# Altium PCB Photoelectric tube to Ammeter 02.PcbDoc
Units mm, origin at the board's own origin, x right, y up, seen from the top; angles counter-clockwise.
Board outline 43 x 34.5 mm, 2 copper layers (Top Layer, Bottom Layer), stack 1.6 mm thick; 9 components, 9 nets, 29 pads, 0 vias.
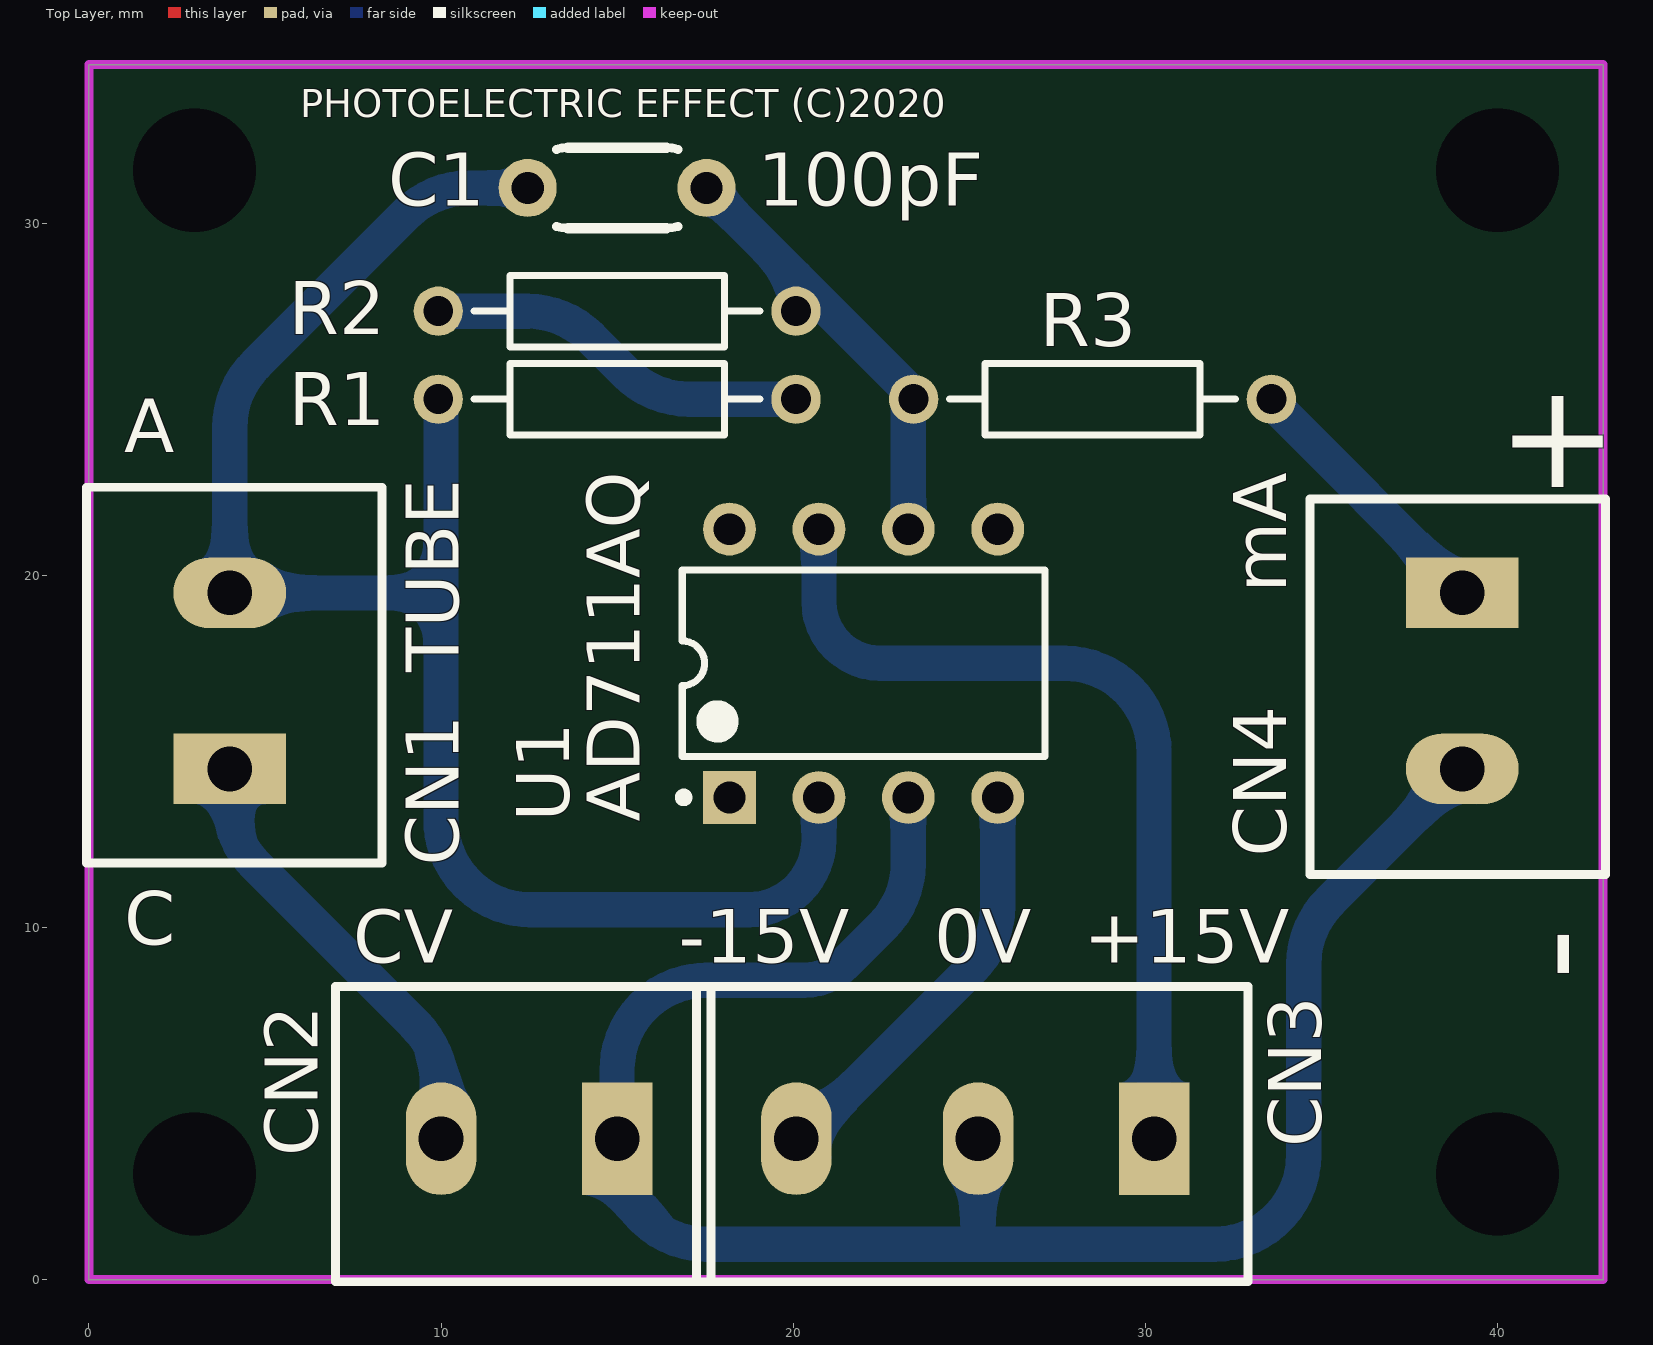
[diagram p0: Top Layer view]
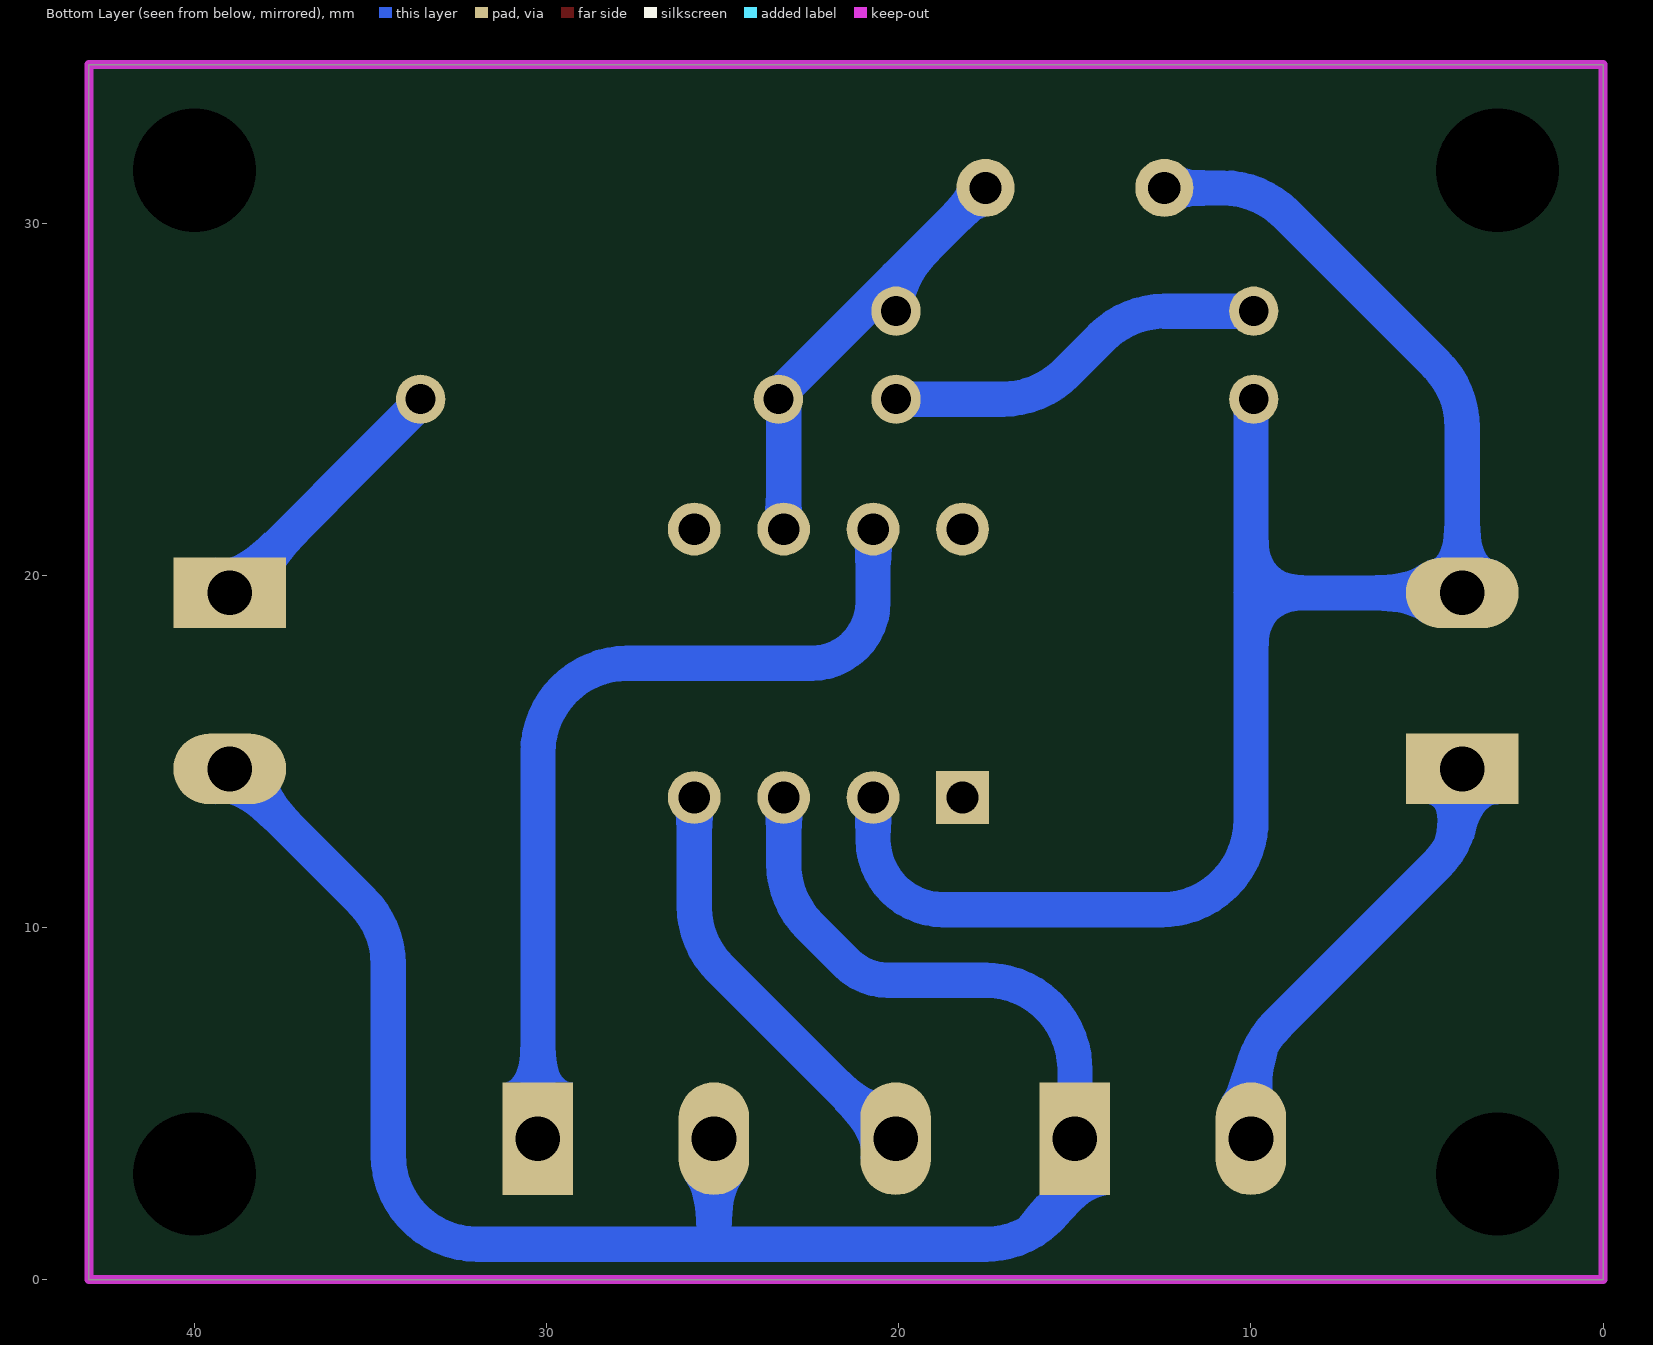
[diagram p1: Bottom Layer view, seen from below]

## Layer stack, top to bottom
Top Solder: solder mask 0.0102, Solder Resist, Dk 3.5
Top Layer: signal copper 0.0356
Dielectric 1: dielectric 1.529, FR-4, Dk 4.8
Bottom Layer: signal copper 0.0356
Bottom Solder: solder mask 0.0102, Solder Resist, Dk 3.5

## Board outline
0,0 43,0 43,34.5 0,34.5

## Design rules (kind name [scope] priority, off if disabled: settings)
Clearance [All] p1: gap=0.254
ComponentClearance [All] p1 off: gap=0.254 collisioncheckmode=3 verticalgap=0.254 showdistances=TRUE
HoleSize [All] p1: absolutevalues=TRUE maxlimit=5 minlimit=0.025 maxpercent=80.000 minpercent=20.000
PolygonConnect [All] p1: connectstyle=Relief reliefconductorwidth=0.254 reliefentries=4 polygonreliefangle="90 Angle" airgapwidth=0.254
RoutingLayers [All] p1: top layer_v5=FALSE bottom layer_v5=TRUE
RoutingVias [All] p1: holewidth=0.711 width=1.27 viastyle="Through Hole" minholewidth=0.711 minwidth=1.27 maxholewidth=0.711 maxwidth=1.27
SolderMaskExpansion [All] p1: expansion=0.102
Width [All] p1: maxlimit=3 minlimit=0.254 preferedwidth=1
27 further rules are at their usual default settings.

## Components (designator, comment, footprint, x,y, rotation, side; value= is the part's Value field where it differs from the comment)
C1 "100pF" C.2 15,31 r0 top locked
CN1 "TUBE" "DG126-5.0 2P" 4,14.5 r90 top locked
CN2 "CV" "DG126-5.0 2P" 15,4 r180 top
CN3 "SUPPLY" "DG126-5.0 3P" 30.25,4 r180 top
CN4 "mA" "DG126-5.0 2P" 39,19.5 r270 top locked
R1 "1M, 1/4W, 1%" AXIAL-0.4 15,25 r0 top locked
R2 "1M, 1/4W, 1%" AXIAL-0.4 15,27.5 r0 top locked
R3 "500, 1/4W, 1%" AXIAL-0.4 28.5,25 r180 top locked
U1 "AD711AQ" DIP-8 22,17.5 r90 top locked

## Footprints (in the part's own frame and the unit in brackets; to place one, negate y for a bottom-side part, rotate by r counter-clockwise, add the part's x,y. Pads: shape width x height; smd on the part's side, far side on the other; paste and mask are expansions set on the pad)
AXIAL-0.4 [mm] "Axial Device, Thru-Hole; 2 Leads; 0.4 in Pin Spacing"
  round 1.4 hole 0.85: 1(-5.08,0) 2(5.08,0)
  silkscreen extent -4.06,-1.02 4.06,1.02
C.2 [mil]
  round 65 hole 36: 1(-100,0) 2(100,0)
  silkscreen extent -68,-45 68,45
"DG126-5.0 2P" [mm]
  rect 2x3.2 hole 1.27: 1(0,0)
  oval 2x3.2 hole 1.27: 2(5,0)
  silkscreen extent -2.67,-4.32 8,4.06, body extent -2.54,-3.92 7.62,4.18, height 10.1
"DG126-5.0 3P" [mm]
  rect 2x3.2 hole 1.27: 1(0,0)
  oval 2x3.2 hole 1.27: 2(5,0) 3(10.16,0)
  silkscreen extent -2.67,-4.32 13,4.06, body extent -2.54,-3.92 12.7,4.18, height 10.1
DIP-8 [mm] "DIP; 8 Leads; Row Spacing 7.62 mm; Pitch 2.54 mm"
  rect 1.5x1.5 hole 0.9: 1(-3.81,3.81)
  round 1.5 hole 0.9: 2(-3.81,1.27) 3(-3.81,-1.27) 4(-3.81,-3.81) 5(3.81,-3.81) 6(3.81,-1.27) 7(3.81,1.27) 8(3.81,3.81)
  silkscreen extent -3.93,-5.15 2.65,5.23, body extent -3.6,-5.15 3.6,5.15, height 5.08

## Part data
C1: library part Cap, "Capacitor"
CN1 CN2 CN4: library part "Header 2H", "Header, 2-Pin, Right Angle"
CN3: library part "Header 3H", "Header, 3-Pin, Right Angle"
R1 R2 R3: library part Res2, "Resistor"
U1: "Precision Low Cost High-Speed BiFET Operational Amplifier"

## Free pads (board coordinates)
  round 1.524 hole 3.5 unplated: 0(3,3) 0(3,31.5) 0(40,3) 0(40,31.5)

## Nets (pads, with @x,y where several pads share a name; then routed paths per layer and width w, separated by ;. In a path a pad name is that pad's centre, name@x,y a point inside that pad or via, vN(x,y) a via of type N, cw(c..) or ccw(c..) an arc to the next point about the centre after c; other vN are vias at no path point)
+15VDC: CN3.1 U1.7 | length 25
  Bottom Layer w1: U1.7 20.73,19.25 ccw(c22.48,19.25) 22.48,17.5 27.71,17.5 cw(c27.71,14.96) 28.702,17.298 cw(c27.71,14.96) 30.048,15.952 cw(c27.71,14.96) 30.25,14.96 CN3.1
-15VDC: CN3.3 U1.4 | length 12
  Bottom Layer w1: CN3.3 ccw(c20.09,4.386) 20.363,4.113 25.066,8.816 ccw(c23.27,10.612) 25.81,10.612 U1.4
A: 
GND: CN2.1 CN3.2 CN4.2 U1.3 | length 54
  Bottom Layer w1: U1.3 23.27,11.822 cw(c20.73,11.822) 22.526,10.026 21.5,9 cw(c20.293,10.207) 20.293,8.5 17.54,8.5 ccw(c17.54,5.96) 16.924,8.424 ccw(c17.54,5.96) 15.076,6.576 ccw(c17.54,5.96) 15,5.96 CN2.1 15,3.54 ccw(c17.54,3.54) 15.076,2.924 ccw(c17.54,3.54) 16.924,1.076 ccw(c17.54,3.54) 17.54,1 25,1 ; CN3.2 25.25,1.25 25,1 ; CN4.2 35.244,10.744 ccw(c37.04,8.948) 34.711,9.961 ccw(c37.04,8.948) 34.5,8.948 34.5,3.54 cw(c31.96,3.54) 31.96,1 25,1
NetC1_1: C1.1 CN1.2 R1.1 U1.2 | length 48.9
  Bottom Layer w1: R1.1 10,24.92 10,19.5 ; C1.1 10.802,31 ccw(c10.802,28.46) 9.006,30.256 4.744,25.994 ccw(c6.54,24.198) 4,24.198 CN1.2 10,19.5 ; U1.2 20.73,12.5 cw(c18.73,12.5) 20.401,11.401 cw(c18.73,12.5) 19.829,10.829 cw(c18.73,12.5) 18.73,10.5 12.54,10.5 cw(c12.54,13.04) 11.924,10.576 cw(c12.54,13.04) 10.076,12.424 cw(c12.54,13.04) 10,13.04 10,19.5
NetC1_2: C1.2 R2.2 R3.2 U1.6 | length 13.1
  Bottom Layer w1: C1.2 20.08,28.46 ; R2.2 20.08,28.46 ; U1.6 R3.2@23.27,25 ; R3.2 23.42,25.12 20.08,28.46
NetCN1_1: CN1.1 CN2.2 | length 12.8
  Bottom Layer w1: CN1.1 4,13.552 ccw(c6.54,13.552) 4.744,11.756 9.256,7.244 cw(c7.46,5.448) 10,5.448 CN2.2
NetCN4_1: CN4.1 R3.1 | length 7.7
  Bottom Layer w1: R3.1 33.58,24.92 CN4.1
NetR1_2: R1.2 R2.1 | length 11
  Bottom Layer w1: R2.1 12.448,27.5 cw(c12.448,24.96) 14.244,26.756 15.256,25.744 ccw(c17.052,27.54) 17.052,25 R1.2
pads on no net: U1.1 U1.5 U1.8

## Keep-outs
Keep-Out Layer:
  the board outline again, w0.254

## Silkscreen, mask and mechanical layers (free items; w line width, h text height)
Top Overlay:
  text "PHOTOELECTRIC EFFECT (C)2020" at 6,33 h0.8
  text "A" at 1,23.5 h1.52
  text "+" at 40,22.5 h3
  text "C" at 1,9.5 h1.52
  text "-15V" at 16.75,9 h1.52
  text "0V" at 24,9 h1.52
  text "+15V" at 28.25,9 h1.52
  text "-" at 43,8.5 h3 r90